# EAGLE board Mozard Nano (EAGLE 9.0.0)
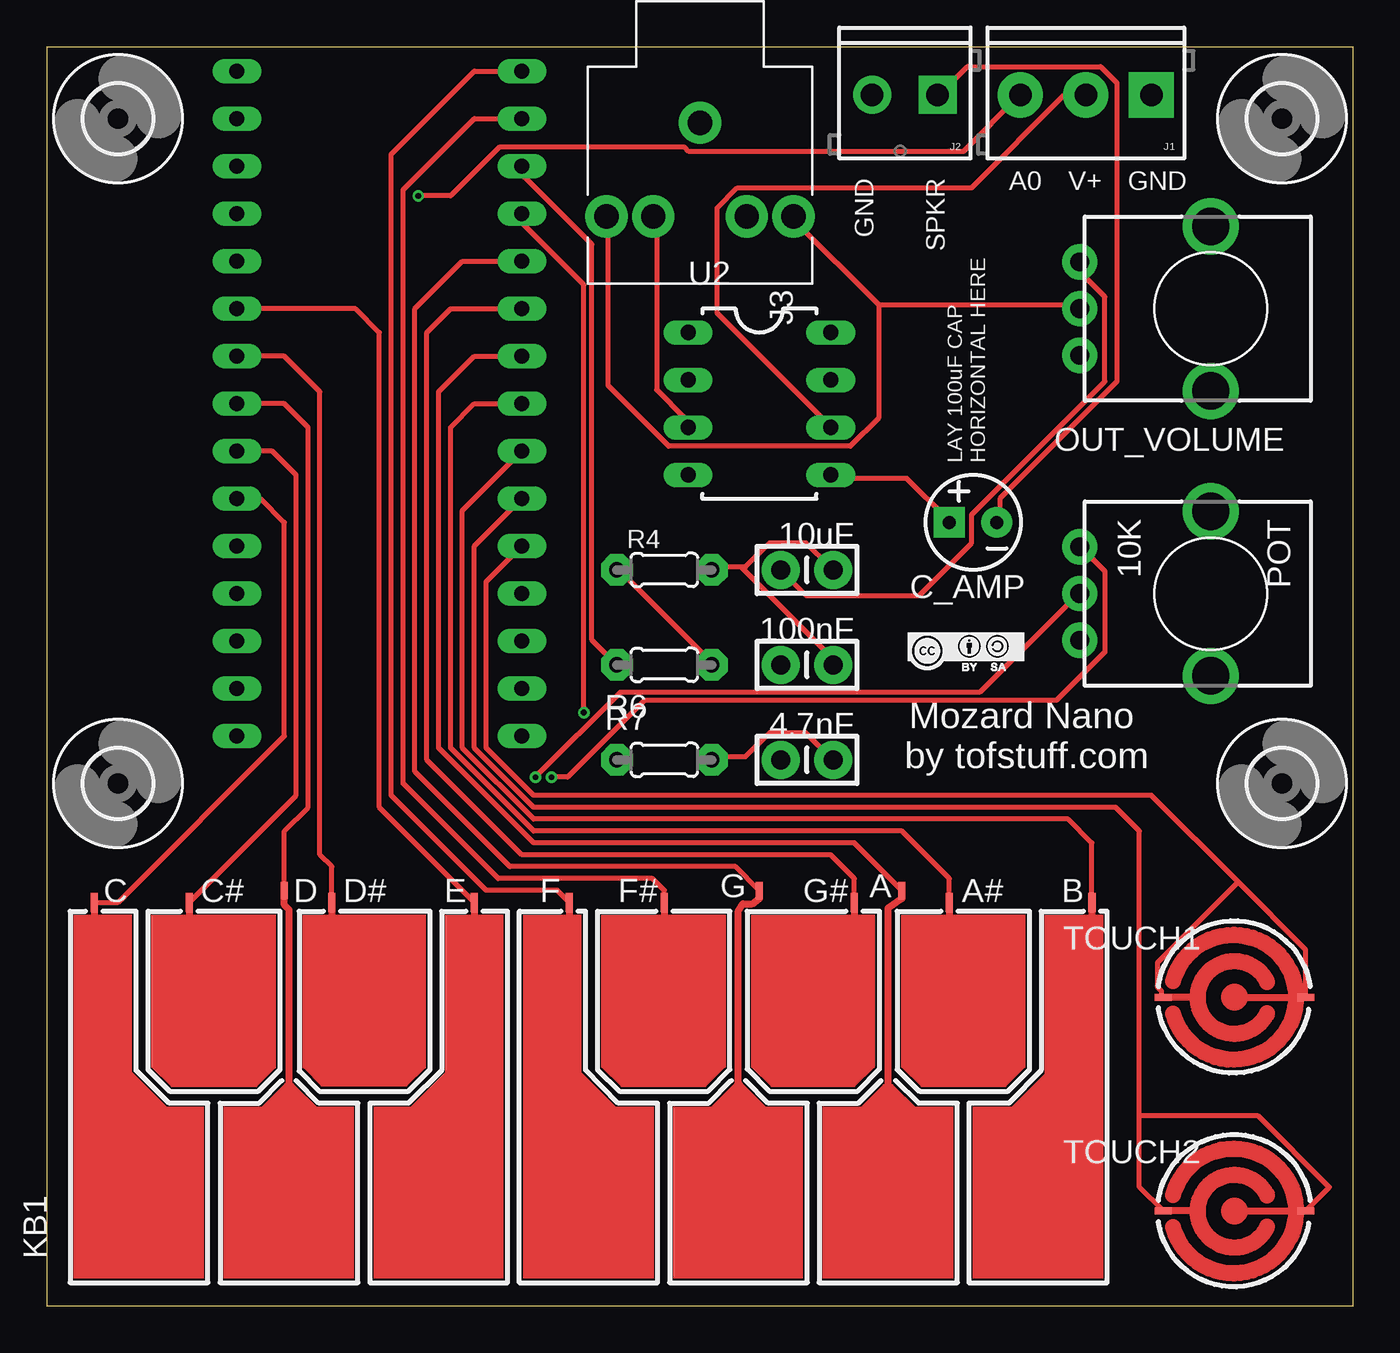
[diagram p0: board, top side]
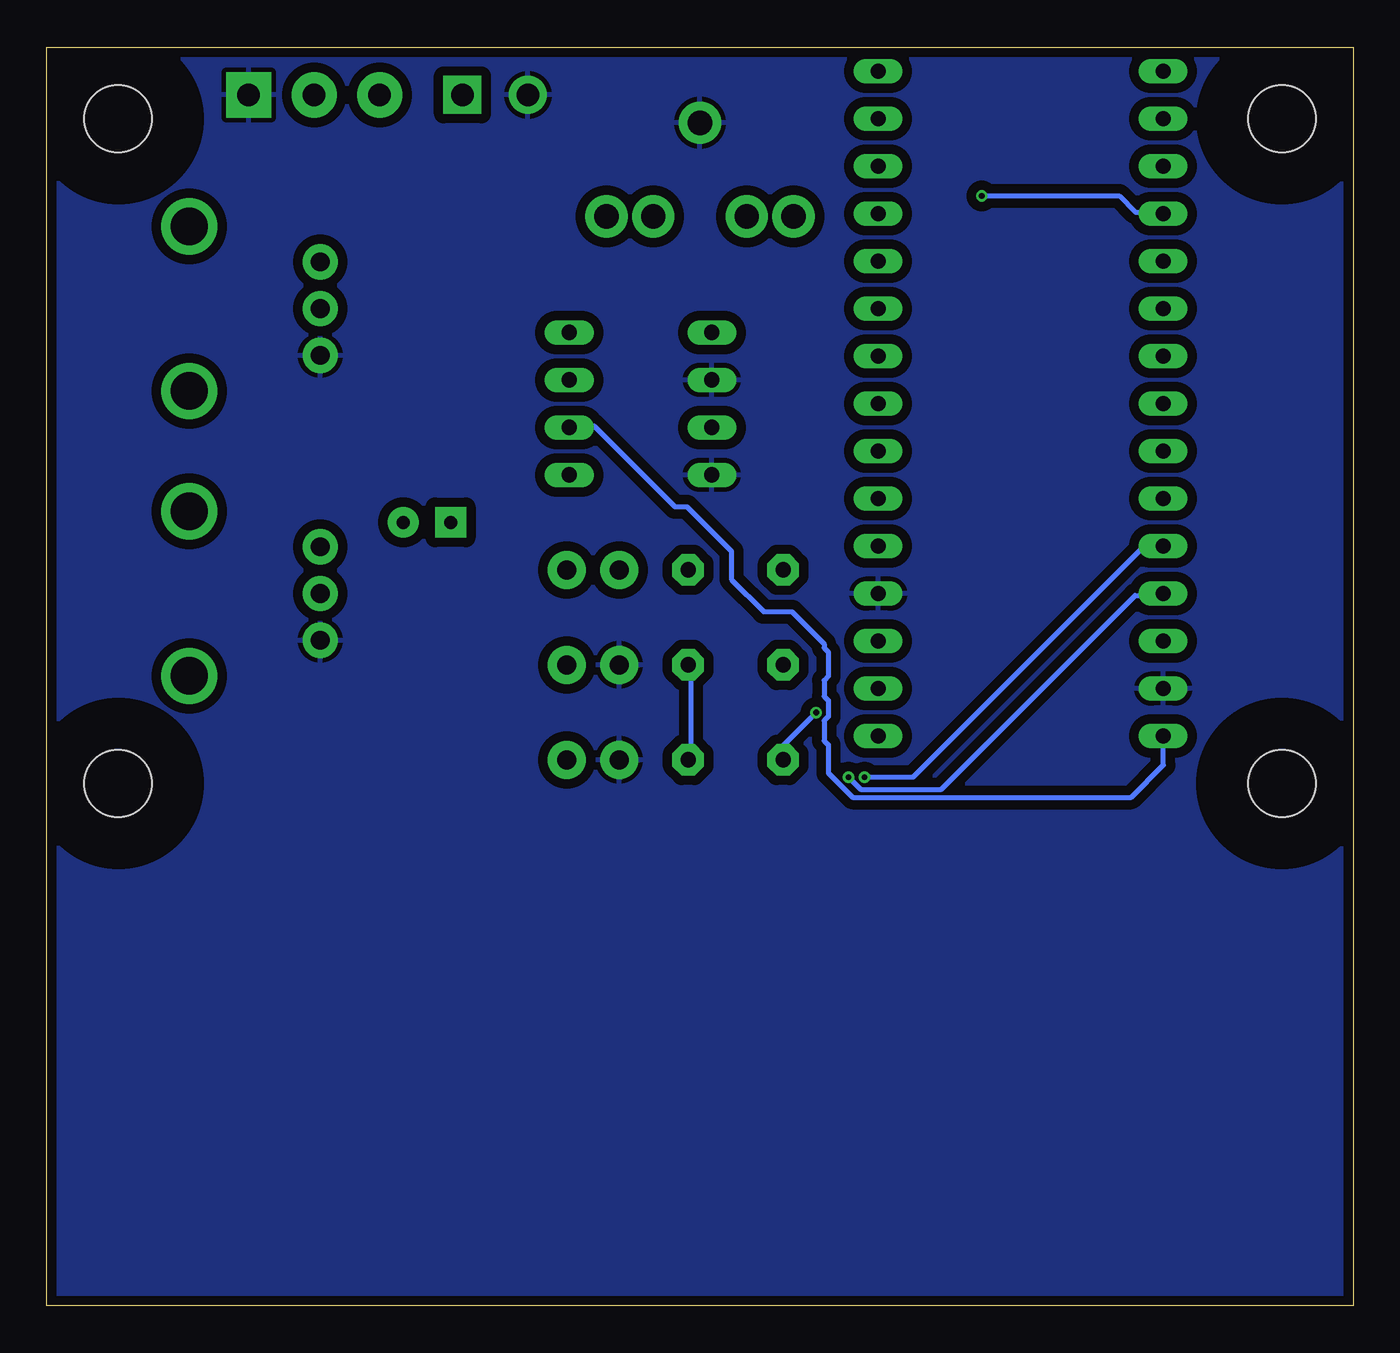
[diagram p1: board, bottom side, seen from below]

Size 69.85 x 67.31 mm. Coordinates in mm from the lower left corner, seen from the top.
Outline: 0,0 69.85,0 69.85,67.31 0,67.31 0,0
Copper layers (1*16): Top 0.035mm / dielectric 1.5mm / Bottom 0.035mm
Design rules "EagleRules *": minimum track width 10mil, minimum drill 12mil, track to track 7mil, track to pad 7mil, pad to pad 7mil, via to via 7mil, smd to smd 0mil, copper to edge 20mil, drill to drill 10mil, minimum pad ring 10mil, minimum via ring 6mil, stop-mask expansion 2mil, vias tented up to drill 25mil, thermal gap 10mil

## Footprints (pad centres in the part's own frame; a part is rotated, then mirrored left to right if it is on the bottom)
CAP-PTH-SMALL-KIT = drill 1.016 pad 2.032: 1 -1.397,0; 2 1.397,0
CPOL-RADIAL-10UF-25V = drill 0.7 pad 1.651 square: + 1.27,0 | drill 0.7 pad 1.651: - -1.27,0
3,6 = hole 3.6: 0,0
SCREWTERMINAL-3.5MM-3 = drill 1.2 pad 2.413 square: 1 0,0 | drill 1.2 pad 2.413: 2 3.5,0; 3 7,0
SCREWTERMINAL-3.5MM-2 = drill 1.2 pad 2.032 square: 1 0,0 | drill 1.2 pad 2.032: 2 3.5,0
STEREO-AUDIO-3.5MM-SWITCHED = drill 1.3 pad 2.261: 1 -1.05,0; 2 3.95,5; 3 3.95,2.5; 4 3.95,-2.5; 5 3.95,-5
PCB-KEYBOARD4 = smd 0.381 x 0.889: A 12.7,10.795; D -20.32,10.795; G 5.08,10.795 | smd 0.381 x 1.016: A# 15.24,10.16; B 22.86,10.16; C -30.48,10.16; C# -25.4,10.16; D# -17.78,10.16; E -10.16,10.16; F -5.08,10.16; F# 0,10.16; G# 10.16,10.16
ALPS_POT_KIT = drill 1 pad 1.88: P$1 7,-2.5; P$2 7,0; P$3 7,2.5 | drill 2: P$4 0,-4.4; P$5 0,4.4
0204/5 = drill 0.813 pad 1.676 octagon: 1 -2.54,0; 2 2.54,0
PCB-TOUCHPAD2 = smd 0.889 x 0.381: 1 -3.81,0; 2 3.81,0
DIP08 = drill 0.813 long: 1 -3.81,-3.81; 2 -1.27,-3.81; 3 1.27,-3.81; 4 3.81,-3.81; 5 3.81,3.81; 6 1.27,3.81; 7 -1.27,3.81; 8 -3.81,3.81
NANO = drill 0.8 long: 3.3V -10.16,24.13; 5V -10.16,-1.27; A0 -10.16,19.05; A1 -10.16,16.51; A2 -10.16,13.97; A3 -10.16,11.43; A4 -10.16,8.89; A5 -10.16,6.35; A6 -10.16,3.81; A7 -10.16,1.27; AREF -10.16,21.59; D2 5.08,1.27; D3 5.08,3.81; D4 5.08,6.35; D5 5.08,8.89; D6 5.08,11.43; D7 5.08,13.97; D8 5.08,16.51; D9 5.08,19.05; D10 5.08,21.59; D11 5.08,24.13; D12 5.08,26.67; D13 -10.16,26.67; GND -10.16,-6.35; GND1 5.08,-1.27; RAW -10.16,-8.89; RST -10.16,-3.81; RST1 5.08,-3.81; RX1 5.08,-6.35; TX0 5.08,-8.89

## Placement (x,y rotation side)
C1  4.7nF  [CAP-PTH-SMALL-KIT]  40.64,29.21 180 top
C2  10uF  [CAP-PTH-SMALL-KIT]  40.64,39.37 180 top
C4  100nF  [CAP-PTH-SMALL-KIT]  40.64,34.29 180 top
C_AMP  100uF  [CPOL-RADIAL-10UF-25V]  49.53,41.91 180 top
H1  MOUNT-HOLE3.6  [3,6]  3.81,27.94 0 top
H2  MOUNT-HOLE3.6  [3,6]  3.81,63.5 0 top
H3  MOUNT-HOLE3.6  [3,6]  66.04,27.94 0 top
H4  MOUNT-HOLE3.6  [3,6]  66.04,63.5 0 top
J1  [SCREWTERMINAL-3.5MM-3]  59.05,64.77 180 top
J2  SPKR  [SCREWTERMINAL-3.5MM-2]  47.62,64.77 180 top
J3  OUT  [STEREO-AUDIO-3.5MM-SWITCHED]  34.92,62.23 270 top
KB1  [PCB-KEYBOARD4]  33.02,11.43 0 top
OUT_VOLUME  10K  [ALPS_POT_KIT]  62.23,53.34 180 top
POT  10K  [ALPS_POT_KIT]  62.23,38.1 180 top
R4  270  [0204/5]  33.02,39.37 0 top
R6  499k  [0204/5]  33.02,34.29 0 top
R7  3.9k  [0204/5]  33.02,29.21 0 top
TOUCH1  [PCB-TOUCHPAD2]  63.5,16.51 0 top
TOUCH2  [PCB-TOUCHPAD2]  63.5,5.08 0 top
U2  LM386  [DIP08]  38.1,48.26 270 top
U$1  NANO  [NANO]  20.32,39.37 0 top
U$2  CC-BY-SA-LOGO2  [CC-BY-SA-LOGO2]  49.33,35.05 0 top

## Library data of the parts
C1 C2 C4 = SparkFun-Capacitors; PROD_ID: CAP-08370
C_AMP J3 KB1 U2 U$2 = Mitch-parts
H1-H4 = holes
J1 = SparkFun-Connectors; PROD_ID: CONN-08288
J2 = SparkFun-Connectors; PROD_ID: CONN-08399
OUT_VOLUME POT = SparkFun-Electromechanical; PROD_ID: RES-09177
R4 R6 R7 = adafruit
TOUCH1 TOUCH2 = TOF
U$1 = Arduino-clone

## Nets
A0: J1.3 U$1.A0
A2: KB1.E U$1.A2
A3: KB1.D# U$1.A3
A4: KB1.D U$1.A4
A5: KB1.C# U$1.A5
A6: KB1.C U$1.A6
D4: KB1.B U$1.D4
D5: KB1.A# U$1.D5
D6: KB1.A U$1.D6
D7: KB1.G# U$1.D7
D8: KB1.G U$1.D8
D9(AUDIO3.9K): R7.1 U$1.D9
D10(AUDIO499K): R6.1 U$1.D10
D11: KB1.F# U$1.D11
D12: KB1.F U$1.D12
GND: C1.2 C4.2 J1.1 J2.2 J3.1 OUT_VOLUME.P$3 POT.P$3 U2.2 U2.4 U$1.GND U$1.GND1
N$1: C_AMP.- J2.1
N$4: C2.1 C4.1 R4.2
N$5: C2.2 OUT_VOLUME.P$1
N$6: J3.4 U2.3
N$7: C_AMP.+ U2.5
N$8: J3.2 J3.5 OUT_VOLUME.P$2
POT: POT.P$2 U$1.A7
TOUCH_A: TOUCH1.1 TOUCH1.2 U$1.D2
TOUCH_B: TOUCH2.1 TOUCH2.2 U$1.D3
UNFILTERED_OUT: C1.1 R4.1 R6.2 R7.2
V+: J1.2 U2.6 U$1.RAW
VCC: POT.P$1 U$1.5V

## Tracks (layer width: path | path; a pad name or v marks a point on that pad's centre or on a via)
A0  (via drill 0.3)
  Top 0.254: v19.86,59.37 21.59,59.37 24.18,61.96 34.11,61.96 34.33,61.75 49.01,61.75 52.03,64.77 J1.3
  Bottom 0.254: v19.86,59.37 12.52,59.37 11.66,58.51 10.36,58.51 U$1.A0
A2
  Top 0.254: KB1.E 17.78,26.67 17.78,52.07 16.51,53.34 U$1.A2
A3
  Top 0.254: KB1.D# 15.24,23.5 14.61,24.13 14.61,48.9 12.7,50.8 U$1.A3
A4
  Top 0.254: KB1.D 12.7,25.4 13.97,26.67 13.97,46.99 12.7,48.26 U$1.A4
A5
  Top 0.254: KB1.C# 13.34,27.3 13.34,44.45 12.06,45.72 U$1.A5
A6
  Top 0.254: KB1.C 3.81,21.59 12.7,30.48 12.7,41.91 11.43,43.18 U$1.A6
D4
  Top 0.254: KB1.B 55.88,24.77 54.61,26.04 26.04,26.04 22.23,29.84 22.23,42.55 U$1.D4
D5
  Top 0.254: KB1.A# 48.26,22.86 45.72,25.4 26.04,25.4 21.59,29.84 21.59,46.99 22.86,48.26 U$1.D5
D6
  Top 0.254: KB1.A 43.18,24.77 26.04,24.77 20.95,29.84 20.95,48.9 22.86,50.8 U$1.D6
D7
  Top 0.254: KB1.G# 43.18,22.86 41.91,24.13 25.4,24.13 20.32,29.21 20.32,52.07 21.59,53.34 U$1.D7
D8
  Top 0.254: U$1.D8 22.23,55.88 19.68,53.34 19.68,28.57 24.77,23.5 36.83,23.5 KB1.G
D9(AUDIO3.9K)  (via drill 0.3)
  Top 0.254: v28.71,31.74 28.71,54.62 25.48,57.86 25.48,58.29 U$1.D9
  Bottom 0.254: v28.71,31.74 30.44,30.01 30.44,29.36 R7.1
D10(AUDIO499K)
  Top 0.254: R6.1 29.15,35.62 29.15,56.78 25.48,60.45 25.48,60.88 U$1.D10
D11
  Top 0.254: KB1.F# 33.02,22.23 32.38,22.86 24.13,22.86 19.05,27.94 19.05,59.69 22.86,63.5 U$1.D11
D12
  Top 0.254: KB1.F 27.3,22.23 23.5,22.23 18.41,27.3 18.41,61.59 22.86,66.04 U$1.D12
GND
  pour Bottom (isolate 0.508): 0,67.31 69.85,67.31 69.85,0 0,0
N$1
  Top 0.254: C_AMP.- 50.95,42.1 50.95,43.18 57.21,49.44 57.21,65.42 56.35,66.28 49.23,66.28 47.71,64.77 J2.1
N$4
  Top 0.254: 37.13,39.51 37.35,39.51 38.65,40.8 40.59,40.8 41.88,39.51 C2.1 | 37.13,39.51 35.62,39.51 R4.2 | 37.13,39.51 41.88,34.76 41.88,34.33 C4.1
N$5
  Top 0.254: OUT_VOLUME.P$1 55.27,55.7 55.27,55.27 56.57,53.98 56.57,49.44 49.44,42.32 49.44,40.8 46.63,38 40.59,38 39.29,39.29 C2.2
N$6
  Top 0.254: U2.3 34.11,47.07 34.11,47.5 32.6,49.01 32.6,58.08 J3.4
N$7
  Top 0.254: U2.5 42.1,44.26 45.99,44.26 48.15,42.1 C_AMP.+
N$8
  Top 0.254: 44.48,53.54 55.05,53.54 OUT_VOLUME.P$2 | 44.48,53.54 39.94,58.08 J3.2 | 44.48,53.54 44.48,47.5 42.96,45.99 33.25,45.99 30.01,49.23 30.01,58.08 J3.5
POT  (via drill 0.3)
  Top 0.254: v26.12,28.28 30.66,32.82 49.87,32.82 55.05,38 POT.P$2
  Bottom 0.254: v26.12,28.28 23.53,28.28 11.23,40.59 10.36,40.59 U$1.A7
TOUCH_A
  Top 0.254: TOUCH1.2 67.31,19.05 63.69,22.67 | U$1.D2 23.5,38.73 23.5,29.84 26.04,27.3 59.05,27.3 63.69,22.67 | 63.69,22.67 59.37,18.35 59.37,17.06 59.59,16.84 59.59,16.62 TOUCH1.1
TOUCH_B
  Top 0.254: TOUCH2.1 58.42,6.35 58.42,10.16 | 58.42,10.16 58.42,25.4 57.15,26.67 26.04,26.67 22.86,29.84 22.86,40.64 U$1.D3 | TOUCH2.2 68.58,6.35 64.77,10.16 58.42,10.16
UNFILTERED_OUT
  Top 0.254: C1.1 40.59,30.66 38.65,30.66 37.35,29.36 35.62,29.36 R7.2 | R4.1 30.66,39.29 35.62,34.33 R6.2
  Bottom 0.254: R7.2 35.41,29.36 35.41,34.11 R6.2
V+
  Top 0.254: J1.2 54.41,64.77 49.44,59.8 36.92,59.8 35.84,58.73 35.84,53.11 41.88,47.07 U2.6
  Bottom 0.254: U$1.RAW 10.15,30.44 10.15,28.93 11.87,27.2 26.77,27.2 28.07,28.5 28.07,30.01 28.28,30.23 28.28,31.3 28.07,31.52 28.07,32.38 28.28,32.6 28.28,33.47 28.07,33.68 28.07,34.98 28.28,35.19 28.28,35.41 30.01,37.13 31.52,37.13 33.25,38.86 33.25,40.37 35.62,42.75 36.27,42.75 40.59,47.07 41.88,47.07 U2.6
VCC  (via drill 0.3)
  Top 0.254: v26.99,28.28 27.85,28.28 31.95,32.38 53.98,32.38 56.57,34.98 56.57,39.29 55.27,40.59 POT.P$1
  Bottom 0.254: v26.99,28.28 26.34,27.64 22.02,27.64 11.66,38 10.36,38 U$1.5V

## Text on the board
tPlace: GND | SPKR | A0 | V+ | GND | 1 | LAY 100uF CAP / HORIZONTAL HERE | Mozard Nano / by tofstuff.com